# EAGLE board PWM-Power-Box_simplified_R1.0 (EAGLE 9.5.1)
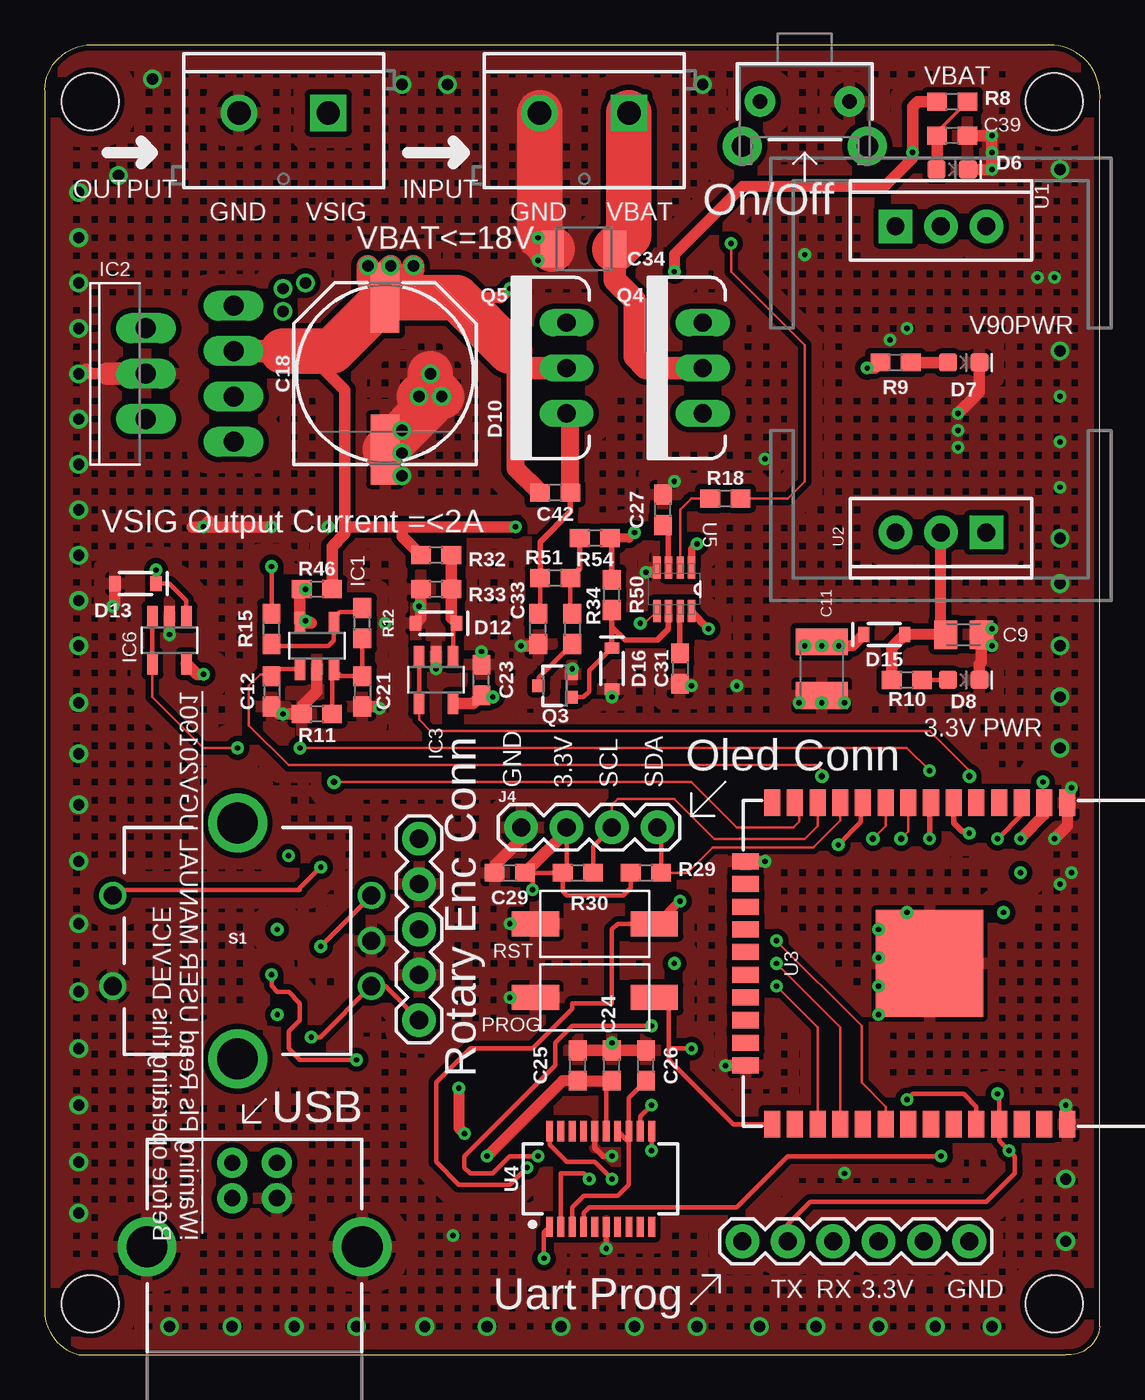
[diagram p0: board, top side]
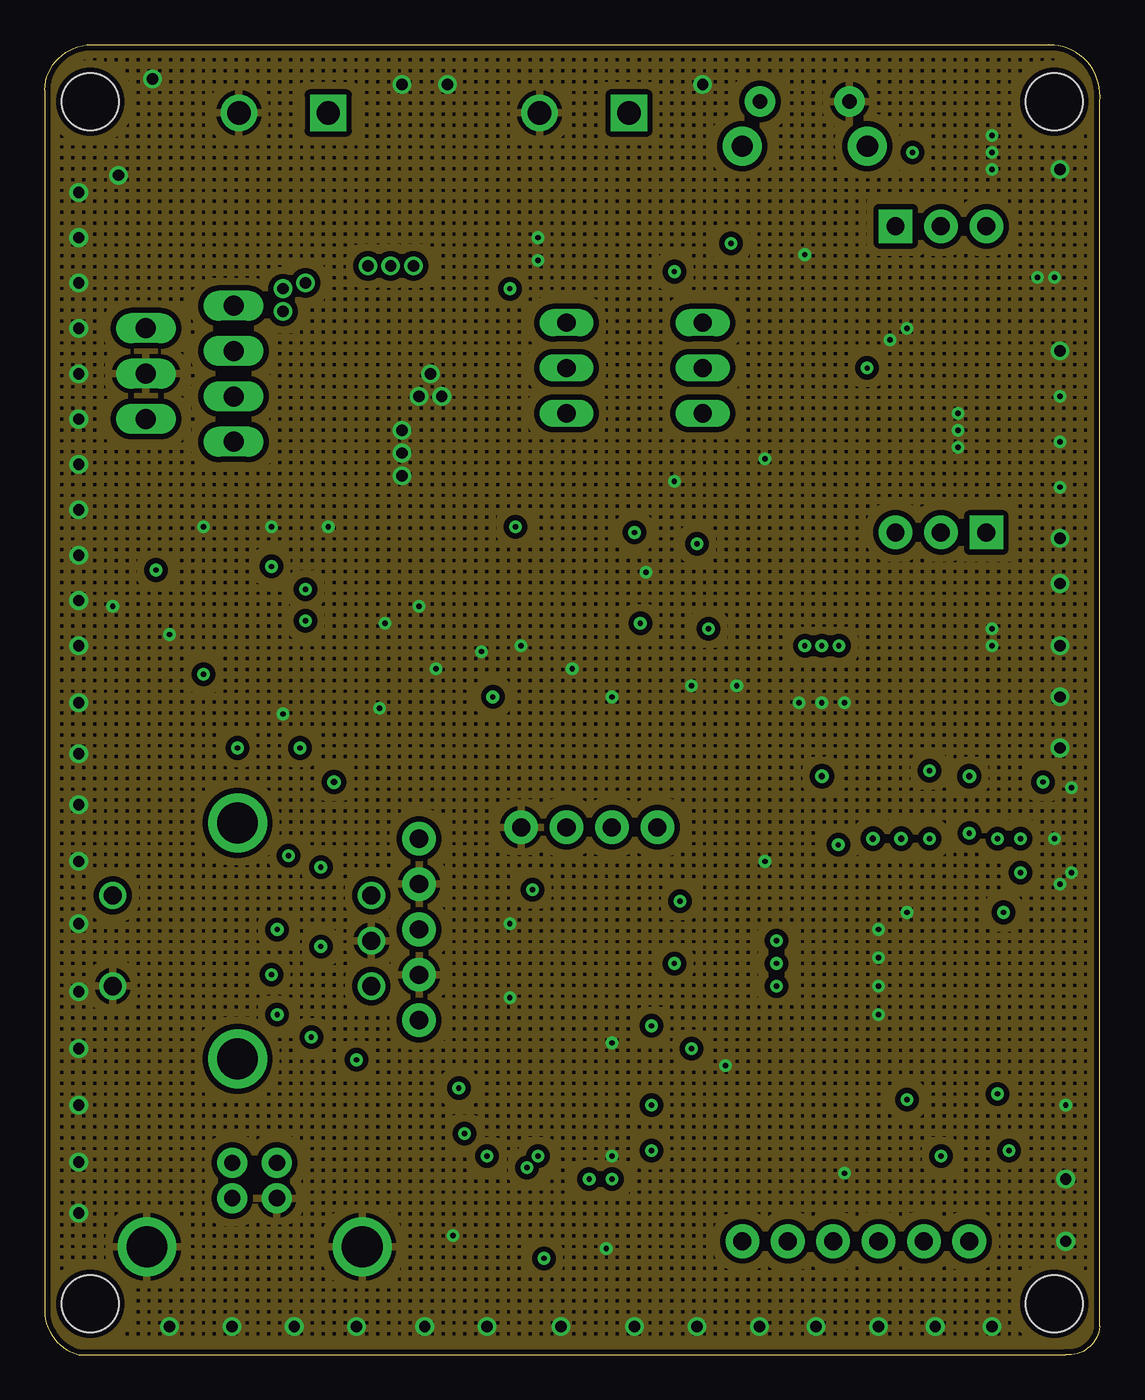
[diagram p1: board, inner layer Route2]
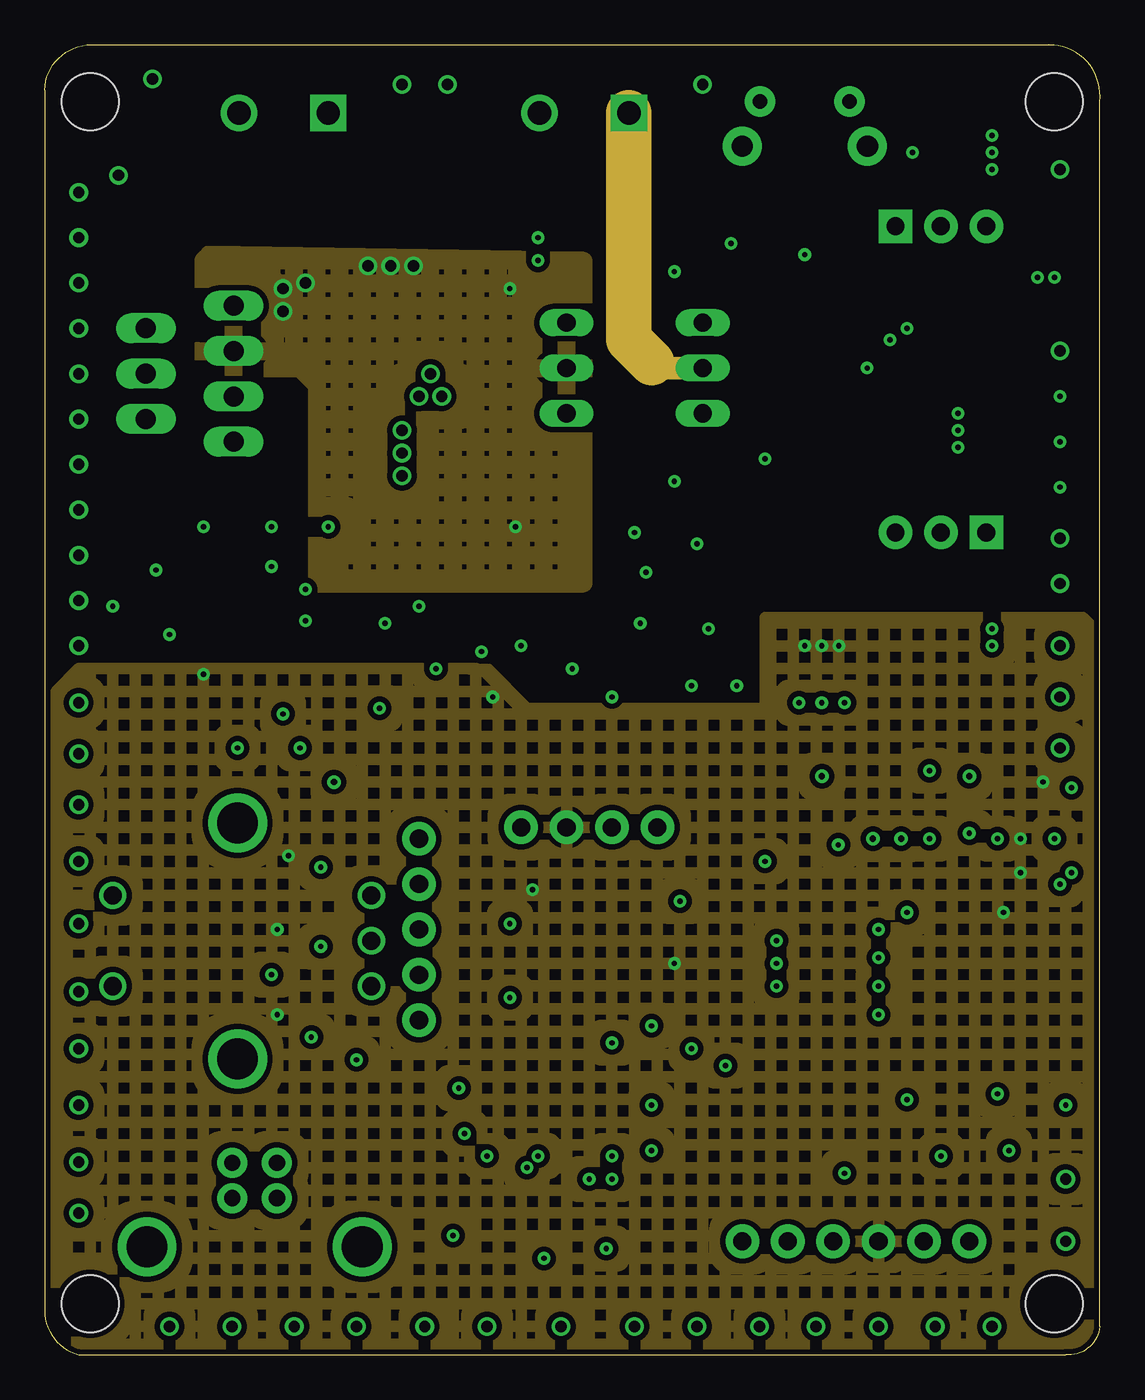
[diagram p2: board, inner layer Route15]
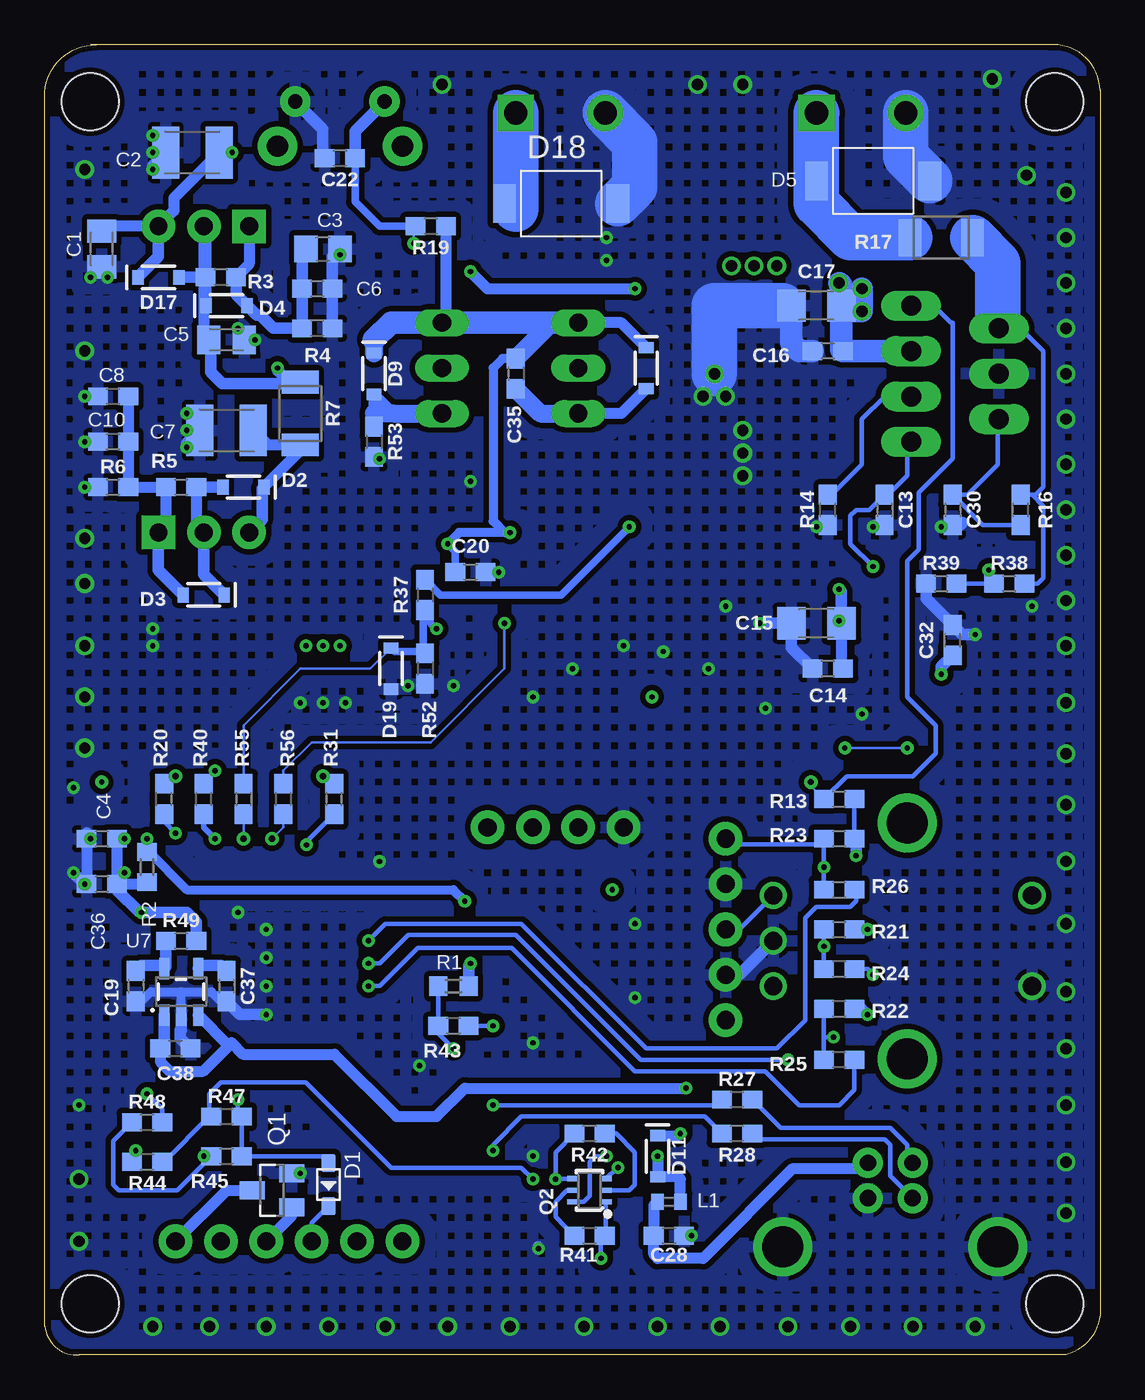
[diagram p3: board, bottom side, seen from below]

Size 59.07 x 73.36 mm. Coordinates in mm from the lower left corner, seen from the top.
Outline: 56.2,73.35 arc-97 59.05,70.17 59.05,1.59 arc-90 57.15,0.01 1.91,0.01 arc-69 0,2.23 0,70.81 arc-94 2.86,73.35 56.52,73.35
Copper layers (1+2*15+16): Top 0.035mm / dielectric 1.5mm / Route2 0.035mm / dielectric 0.15mm / Route15 0.035mm / dielectric 0.2mm / Bottom 0.035mm
Design rules "default *": minimum track width 6mil, minimum drill 0.3mm, track to track 6mil, track to pad 6mil, pad to pad 6mil, via to via 6mil, smd to smd 0mil, copper to edge 10mil, drill to drill 6mil, minimum pad ring 10mil, minimum via ring 8mil, stop-mask expansion 4mil, vias tented up to drill 0.4mm, thermal gap 10mil
Net classes: 1 gnd: width 0.635 mm, drill 0.635 mm, clearance 0.254 mm; 2 vcc: width 0.406 mm, drill 0.406 mm, clearance 0.254 mm
Holes 3.2 mm at 2.54,70.17 56.52,70.17 56.52,2.86 2.54,2.86

## Footprints (pad centres in the part's own frame; a part is rotated, then mirrored left to right if it is on the bottom)
C0805K = smd 1.3 x 1.6: 1 -1,0; 2 1,0
C1210K = smd 1.5 x 2.9: 1 -1.5,0; 2 1.5,0
C0805 = smd 1.3 x 1.5: 1 -0.95,0; 2 0.95,0
C0603 = smd 1.1 x 1: 1 -0.85,0; 2 0.85,0
0603 = smd 1.1 x 1: 1 -0.85,0; 2 0.85,0
1206 = smd 1.6 x 1.8: 1 -1.4,0; 2 1.4,0
PANASONIC_G = smd 3.9 x 1.6: + 4.25,0; - -4.25,0
1210 = smd 1.27 x 2.06: 1 -1.755,0; 2 1.755,0
SOD-323 = smd 1 x 0.8: + -1.2,0; - 1.2,0
SOD-323' = smd 0.63 x 0.83: A 1.15,0; C -1.15,0
SMBG = smd 1.27 x 2.16: A 3.17,0; C -3.17,0
LED-0603 = smd 1 x 1: A -0.877,0; C 0.877,0
SOT23-5 = smd 0.6 x 1.2: 1 -0.95,-1.306; 2 0,-1.306; 3 0.95,-1.306; 4 0.95,1.306; 5 -0.95,1.306
TO220-7 = drill 1.118 pad 1.626 long: 1 -3.81,-8.036; 2 -2.54,-3.126; 3 -1.27,-8.036; 4 0,-3.126; 5 1.27,-8.036; 6 2.54,-3.126; 7 3.81,-8.036
SCREWTERMINAL-5MM-2 = drill 1.3 pad 2.032 square: 1 0,0 | drill 1.3 pad 2.032: 2 5,0
1X05 = drill 1.016 pad 1.88: 1 0,0; 2 2.54,0; 3 5.08,0; 4 7.62,0; 5 10.16,0
USB-B-PTH = drill 0.914 pad 1.676: D+ 4,1.25; D- 5.981,1.25; GND 4,-1.25; VBUS 5.981,-1.25 | drill 2.286: SHLD1 1.282,-6.02; SHLD2 1.282,6.02
1X04 = drill 1.016 pad 1.88: 1 0,0; 2 2.54,0; 3 5.08,0; 4 7.62,0
1X06 = drill 1.016 pad 1.88: 1 0,0; 2 2.54,0; 3 5.08,0; 4 7.62,0; 5 10.16,0; 6 12.7,0
0402 = smd 0.7 x 0.9: 1 -0.65,0; 2 0.65,0
SOT23 = smd 1 x 1.4: 1 -0.95,-1.1; 2 0.95,-1.1; 3 0,1.1
SC70-6 = smd 0.3 x 0.66: 1 -0.65,-0.92; 2 0,-0.92; 3 0.65,-0.92; 4 0.65,0.92; 5 0,0.92; 6 -0.65,0.92
SOT323 = smd 0.7 x 0.7: 1 -0.65,-0.925; 2 0.65,-0.925; 3 0,0.925
TO220V = drill 1.016 long: 1 -2.54,0; 2 0,0; 3 2.54,0
R0603 = smd 1 x 1.1: 1 -0.85,0; 2 0.85,0
ROTARY_ENC_PLAIN = drill 1.016: A 7.493,-2.54; B 7.493,2.54; C 7.493,0; SW+ -6.985,2.54; SW- -6.985,-2.54 | drill 2.286: P$3 0,6.604; P$4 0,-6.604
TACTILE_SWITCH_PTH_RIGHT_ANGLE_KIT = drill 0.8 pad 1.7: 1 -2.5,0; 2 2.5,0 | drill 1.2 pad 2.2: ANCHOR1 -3.5,2.5; ANCHOR2 3.5,2.5
SW2-4.0-6.0X3.0X2.5MM = smd 2.65 x 1.4: 1 -3.325,0; 2 3.325,0
TO220-ADJ = drill 1 pad 1.88 square: ADJ -2.54,0 | drill 1 pad 1.88: IN 2.54,0; OUT 0,0
ESP-WROOM-32 = smd 0.9 x 1.5: 1 7.7,9; 2 6.43,9; 3 5.16,9; 4 3.89,9; 5 2.62,9; 6 1.35,9; 7 0.08,9; 8 -1.19,9; 9 -2.46,9; 10 -3.73,9; 11 -5,9; 12 -6.27,9; 13 -7.54,9; 14 -8.81,9; 25 -8.81,-9; 26 -7.54,-9; 27 -6.27,-9; 28 -5,-9; 29 -3.73,-9; 30 -2.46,-9; 31 -1.19,-9; 32 0.08,-9; 33 1.35,-9; 34 2.62,-9; 35 3.89,-9; 36 5.16,-9; 37 6.43,-9; 38 7.7,-9 | smd 1.5 x 0.9: 15 -10.3,5.715; 16 -10.3,4.445; 17 -10.3,3.175; 18 -10.3,1.905; 19 -10.3,0.635; 20 -10.3,-0.635; 21 -10.3,-1.905; 22 -10.3,-3.175; 23 -10.3,-4.445; 24 -10.3,-5.715 | smd 6 x 6: GND 0,0
SSOP20_L = smd 0.381 x 1.143: 1 -2.857,-2.68; 2 -2.223,-2.68; 3 -1.587,-2.68; 4 -0.953,-2.68; 5 -0.318,-2.68; 6 0.318,-2.68; 7 0.953,-2.68; 8 1.587,-2.68; 9 2.223,-2.68; 10 2.857,-2.68; 11 2.857,2.68; 12 2.223,2.68; 13 1.587,2.68; 14 0.953,2.68; 15 0.318,2.68; 16 -0.318,2.68; 17 -0.953,2.68; 18 -1.587,2.68; 19 -2.223,2.68; 20 -2.857,2.68
SOT65P280X100-8N = smd 1.219 x 0.406: 1 -1.219,0.965; 2 -1.219,0.33; 3 -1.219,-0.33; 4 -1.219,-0.965; 5 1.219,-0.965; 6 1.219,-0.33; 7 1.219,0.33; 8 1.219,0.965
SOT23-5' = smd 0.55 x 1.2: 1 -0.95,-1.3; 2 0,-1.3; 3 0.95,-1.3; 4 0.95,1.3; 5 -0.95,1.3

## Placement (x,y rotation side)
C1  0.1uF  [C0805K]  55.88,61.92 270 bottom
C2  10uF/25V/X5R  [C1210K]  50.8,67.32 180 bottom
C3  10uF/25V/X5R  [C0805]  43.5,61.92 0 bottom
C4  10u  [C0603]  55.88,28.9 180 bottom
C5  1uF/25V  [C0805K]  48.9,56.84 0 bottom
C6  0.1uF  [C0603]  43.82,59.7 0 bottom
C7  10uF/25V/X5R  [C1210K]  48.9,51.76 180 bottom
C8  10uF/25V/X5R  [C0603]  55.25,53.66 180 bottom
C9  1uF/25V  [C0805K]  51.44,40.33 0 top
C10  0.1uF  [C0603]  55.25,51.12 180 bottom
C11  10uF/25V/X5R  [C1210K]  43.5,38.42 270 top
C12  5.6PF  [0603]  12.7,37.15 270 top
C13  5.6PF  [0603]  12.06,47.31 270 bottom
C14  0.1uF/25V/X7R  [0603]  15.24,38.42 180 bottom
C15  10uF  [1206]  15.88,40.96 180 bottom
C16  0.1uF/25V/X7R  [0603]  15.24,56.2 180 bottom
C17  10uF  [1206]  15.88,58.74 180 bottom
C18  560uF  [PANASONIC_G]  19.05,54.93 90 top
C19  4.7uF  [0603]  53.98,20.64 270 bottom
C20  0.1uF  [0603]  35.24,43.82 0 bottom
C21  5.6PF  [0603]  17.78,37.15 270 top
C22  0.1uF  [0603]  42.55,67 180 bottom
C23  0.1uF  [0603]  24.45,37.79 90 top
C24  0.1uF  [0603]  31.75,16.2 90 top
C25  4.7uF  [0603]  29.84,16.2 90 top
C26  0.1uF  [0603]  33.66,16.2 90 top
C27  0.22uF  [0603]  34.61,47.31 90 top
C28  0.1uF  [0603]  24.13,6.67 0 bottom
C29  4.7uF  [0603]  26.04,26.99 0 top
C30  5.6PF  [0603]  8.26,47.31 270 bottom
C31  0.22uF  [0603]  35.56,38.42 270 top
C32  0.1uF  [0603]  8.26,40.01 90 bottom
C33  1uF  [0603]  27.62,40.65 90 top
C34  10uF  [1210]  30.16,61.92 180 top
C35  10nF  [0603]  32.7,54.93 270 bottom
C36  0.1uF  [C0603]  55.88,26.36 180 bottom
C37  470pF  [0603]  48.9,20.64 270 bottom
C38  4.7uF  [0603]  51.75,17.15 0 bottom
C39  10nF  [C0603]  50.8,68.27 180 top
C42  10nF  [0603]  28.57,48.27 180 top
D1  [SOD-323]  43.18,9.53 270 bottom
D2  250mA/100V  [SOD-323']  47.94,48.58 180 bottom
D3  250mA/100V  [SOD-323']  50.17,42.55 180 bottom
D4  250mA/100V  [SOD-323']  48.9,58.74 0 bottom
D5  24V  [SMBG]  12.7,65.73 0 bottom
D6  GREEN  [LED-0603]  50.8,66.36 0 top
D7  GREEN  [LED-0603]  51.44,55.57 0 top
D8  GREEN  [LED-0603]  51.44,37.79 0 top
D9  10V  [SOD-323']  40.64,54.93 270 bottom
D10  10V  [SOD-323']  25.4,55.25 270 bottom
D11  1A/23V/620mV  [SOD-323']  24.77,11.12 270 bottom
D12  3.3V  [SOD-323']  21.91,40.96 180 top
D13  3.3V  [SOD-323']  5.08,43.19 180 top
D15  1A/23V/620mV  [SOD-323']  46.99,40.33 0 top
D16  6v  [SOD-323']  31.75,38.42 270 top
D17  250mA/100V  [SOD-323']  52.71,60.33 0 bottom
D18  24v  [SMBG]  30.16,64.46 0 bottom
D19  3.3V  [SOD-323']  39.69,38.42 270 bottom
IC1  LM321MF  [SOT23-5]  15.24,39.69 0 top
IC2  OPA548T  [TO220-7]  2.54,54.93 90 top
IC3  LMV321M5X  [SOT23-5]  21.91,37.79 180 top
IC6  LMV321M5X  [SOT23-5]  6.98,40.01 180 top
J1  [SCREWTERMINAL-5MM-2]  32.7,69.54 180 top
J2  [1X05]  20.95,18.74 90 top
J3  USB_B_PTH  [USB-B-PTH]  11.75,4.77 90 top
J4  [1X04]  26.67,29.53 0 top
J5  [SCREWTERMINAL-5MM-2]  15.88,69.54 180 top
J7  [1X06]  39.05,6.36 0 top
L1  Ferrite Bead  [0402]  24.13,8.58 0 bottom
Q1  2N7002  [SOT23]  46.36,9.21 90 bottom
Q2  MBT3904DW1T1  [SC70-6]  28.57,9.21 90 bottom
Q3  310mA/60V/1.6Ω  [SOT323]  28.57,37.47 90 top
Q4  FQP27P06 -60V -27A P-CH  [TO220V]  36.83,55.25 90 top
Q5  FQP27P06 -60V -27A P-CH  [TO220V]  29.21,55.25 90 top
R1  10k  [R0603]  36.2,20.64 0 bottom
R2  10k  [R0603]  53.34,27.31 270 bottom
R3  240  [0603]  49.21,60.33 180 bottom
R4  1.5k  [0603]  43.82,57.47 180 bottom
R5  240  [0603]  51.44,48.58 0 bottom
R6  390  [0603]  55.25,48.58 0 bottom
R7  0  [1210]  44.77,52.71 270 bottom
R8  5.6k  [0603]  50.8,70.17 0 top
R9  3.7k  [0603]  47.62,55.57 0 top
R10  750  [0603]  48.26,37.79 0 top
R11  2.4k  [0603]  15.24,35.88 180 top
R12  10k  [0603]  17.78,40.96 90 top
R13  10k  [0603]  14.61,31.12 0 bottom
R14  10k  [0603]  15.24,47.31 90 bottom
R15  0  [0603]  12.7,40.65 90 top
R16  0  [0603]  4.45,47.31 90 bottom
R17  0  [1210]  8.89,62.55 180 bottom
R18  1k  [0603]  38.1,47.95 0 top
R19  10k  [0603]  37.47,63.19 180 bottom
R20  0  [0603]  52.39,31.12 90 bottom
R21  10k  [0603]  14.61,23.82 0 bottom
R22  10k  [0603]  14.61,19.37 0 bottom
R23  10k  [0603]  14.61,28.9 0 bottom
R24  1k  [0603]  14.61,21.6 180 bottom
R25  1k  [0603]  14.61,16.52 180 bottom
R26  1k  [0603]  14.61,26.04 0 bottom
R27  27  [0603]  20.32,14.29 0 bottom
R28  27  [0603]  20.32,12.39 180 bottom
R29  4.7k  [0603]  33.66,26.99 0 top
R30  4.7k  [0603]  29.84,26.99 0 top
R31  0  [0603]  42.86,31.12 90 bottom
R32  9.1k  [0603]  21.91,44.77 180 top
R33  1k  [0603]  21.91,42.87 0 top
R34  15k  [0603]  29.53,40.65 270 top
R37  14K  [0603]  37.78,42.55 270 bottom
R38  9.1k  [0603]  5.08,43.19 0 bottom
R39  1k  [0603]  8.89,43.19 0 bottom
R40  0  [0603]  50.17,31.12 90 bottom
R41  10k  [0603]  28.57,6.67 0 bottom
R42  10k  [0603]  28.57,12.39 180 bottom
R43  0  [0603]  36.2,18.42 0 bottom
R44  10k(NOSTUFF)  [0603]  53.34,10.8 180 bottom
R45  10k  [0603]  48.9,11.12 0 bottom
R46  0  [0603]  15.24,42.87 0 top
R47  10k  [0603]  48.9,13.34 0 bottom
R48  10k(NOSTUFF)  [0603]  53.34,13.02 0 bottom
R49  0  [0603]  51.44,23.18 0 bottom
R50  10k  [0603]  31.75,42.55 90 top
R51  100k  [0603]  28.57,43.5 0 top
R52  1k  [0603]  37.78,38.42 270 bottom
R53  10k  [0603]  40.64,51.12 270 bottom
R54  10k  [0603]  30.8,45.73 180 top
R55  0  [0603]  47.94,31.12 270 bottom
R56  0  [0603]  45.72,31.12 270 bottom
S1  ENCODER-SWITCH  [ROTARY_ENC_PLAIN]  10.79,23.18 0 top
S2  MOMENTARY-SWITCH-SPST-PTH-RIGHT-ANGLE-KIT  [TACTILE_SWITCH_PTH_RIGHT_ANGLE_KIT]  42.55,70.17 180 top
SW1  PROG  [SW2-4.0-6.0X3.0X2.5MM]  30.8,20.01 0 top
SW2  RST  [SW2-4.0-6.0X3.0X2.5MM]  30.8,24.14 0 top
U1  V_REG_317SINK  [TO220-ADJ]  50.17,63.19 0 top
U2  V_REG_317SINK  [TO220-ADJ]  50.17,46.04 180 top
U3  ESP-WROOM-32  [ESP-WROOM-32]  49.53,21.91 0 top
U4  FT231XS  [SSOP20_L]  31.11,9.85 0 top
U5  LTC2950CTS8-1TRPBF  [SOT65P280X100-8N]  35.24,42.87 270 top
U7  MIC5219 3.3V  [SOT23-5']  51.44,20.33 0 bottom

## Library data of the parts
C1-C3 C5-C11 C39 = rcl; SPICEPREFIX: C
C4 C36 R1 R2 = rcl
C12-C14 C16 C19 C21 C23-C26 C28-C30 C32 C37 C38 = SparkFun-Capacitors; PROD_ID: CAP-12456
C15 C17 = SparkFun-Capacitors; PROD_ID: CAP-10057
C18 = SparkFun-Capacitors; PROD_ID: CAP-09983
C20 C22 C27 C31 C33 C35 C42 = SparkFun-Capacitors; PROD_ID: CAP-11015
C34 = SparkFun-Capacitors; PROD_ID: CAP-09824
D1 = Seeed-OPL-Diode
D2-D4 D17 = SparkFun-DiscreteSemi; PROD_ID: DIO-09646
D5 D18 = diode
D6-D8 = SparkFun-LED; PROD_ID: DIO-00821
D9 D10 D16 D19 = SparkFun-DiscreteSemi; PROD_ID: DIO-08199
D11 D15 = SparkFun-DiscreteSemi; PROD_ID: DIO-11623
D12 D13 = SparkFun-DiscreteSemi; PROD_ID: DIO-11284
IC1 IC3 IC6 = linear
IC2 = burr-brown; MF: TEXAS INSTRUMENTS; MPN: OPA548T; OC_FARNELL: 1564885; OC_NEWARK: 69K2680
J1 J5 = SparkFun-Connectors; SF_SKU: PRT-08432
J2 = SparkFun-Connectors
J3 = SparkFun-Connectors; PROD_ID: CONN-08278; SF_ID: PRT-00139
J4 = SparkFun-Connectors; PROD_ID: CONN-09696
J7 = SparkFun-Connectors; PROD_ID: CONN-08437
L1 = inductors
Q1 = nxp_60_1_1
Q2 = SparkFun-DiscreteSemi; PROD_ID: TRANS-13337
Q3 = SparkFun-DiscreteSemi; PROD_ID: TRANS-11151
Q4 Q5 = SparkFun-DiscreteSemi; PROD_ID: TRANS-13060
R3-R6 R8-R16 R20-R33 R38-R49 = SparkFun-Resistors; PROD_ID: RES-08306
R7 R17 = SparkFun-Resistors; PROD_ID: RES-12374
R18 R19 R34 R37 R50-R54 = SparkFun-Resistors; PROD_ID: RES-07828
R55 R56 = SparkFun-Resistors; PROD_ID: RES-07856
S1 = SparkFun-Switches; SF_SKU: COM-09117
S2 = SparkFun-Switches; PROD_ID: CONN-10672; SF_SKU: COM-10791
SW1 SW2 = Seeed-OPL-Switch
U1 U2 = SparkFun-IC-Power
U3 = esp32
U4 = SparkFun-IC-Comms; PROD_ID: IC-11524
U5 = LTC2950CTS8-1TRPBF; AVAILABILITY: Unavailable; DESCRIPTION: PUSHBUTTON, CNTRL, 26.4VIN, 8TSOT23; SVHC: No SVHC _20-Jun-2013_; MF: Linear Technology/Analog; MP: LTC2950CTS8-1#TRPBF; PACKAGE: TSOT-23 Linear Technology; PRICE: None
U7 = SparkFun-IC-Power; PROD_ID: VREG-09872

## Nets
!INT: R56.1 U5.5
!KILL: D19.C R37.2 R52.1 R55.1 U5.8
!PB: R18.1 U5.2
!PB1: C22.1 R18.2 R19.2 S2.2
AMP_DAC1_OUT: R31.1 U3.10
BAT_ADC_IN: R20.1 U3.6
BAT_OP_IN: D12.C IC3.1 R32.1 R33.2
BAT_OP_OUT: IC3.3 IC3.4 R20.2
CLK: U3.20
CMD: U3.19
DAC_OP_OUT: IC6.3 IC6.4 R40.2
DAC_OUT_OP_IN: D13.C IC6.1 R38.1 R39.2
DTR: Q2.1 R41.2 U4.1
EN: Q2.3 R2.1 SW2.2 U3.3
FT232_RXD: R45.1 R48.1 U4.4
FT232_TXD: R44.1 R47.1 U4.20
GND [gnd]: C1.2 C2.2 C3.2 C4.2 C5.2 C6.2 C7.2 C8.2 C9.2 C10.2 C11.2 C12.2 C13.2 C14.2 C15.2 C16.2 C17.2 C18.- C19.2 C20.2 C21.2 C22.2 C23.2 C24.2 C25.2 C26.2 C27.2 C28.2 C29.1 C30.2 C31.2 C32.2 C33.1 C34.2 C36.2 C37.2 C38.2 C39.1 D5.A D6.C D7.C D8.C D12.A D13.A D16.A D18.A D19.A IC1.2 IC2.4 IC3.2 IC6.2 J1.2 J2.2 J2.4 J3.GND J3.SHLD1 J3.SHLD2 J4.1 J5.2 Q1.2 Q3.2 R4.1 R6.1 R11.2 R14.1 R33.1 R39.1 R52.2 R53.2 S1.C S1.SW- S2.1 SW1.1 SW2.1 U3.1 U3.15 U3.24 U3.38 U3.GND U4.6 U4.16 U5.4 U7.2
GND_IN [gnd]: J7.6 Q1.3
IO0: R1.1 R43.1 SW1.2 U3.25
IO4: U3.26
IO5: U3.29
IO8: U3.22
IO12: U3.14
IO13: U3.16
IO15: U3.23
IO19: U3.31
IO21: U3.33
IO23: U3.37
IO32: R55.2 U3.8
IO33: R56.2 U3.9
IO36: U3.4
IO39: U3.5
LM321_IN+: C12.1 IC1.1 R31.2
LM321_IN-: C21.1 IC1.3 R11.1 R12.1
LM321_OUT: IC1.4 R12.2 R15.1
LTC2950_EN: D16.C Q3.1 R50.1 U5.6
MIC5219_IN: C38.1 D11.C U7.1 U7.3
MIC5219_V33: C19.1 R49.1 U7.5
N$1: C3.1 C6.1 D4.A R3.1 R4.2 U1.ADJ
N$2: C8.1 C10.1 D3.A R5.1 R6.2 U2.ADJ
N$3: C7.1 D2.C R7.2 U2.IN
N$4: C39.2 D6.A R8.2
N$5: D7.A R9.2
N$6: D8.A R10.2
N$7: C37.1 U7.4
N$8: C33.2 C35.2 C42.1 D10.A Q5.1 R51.1
N$9: D9.A Q4.1 R53.1
N$11: Q3.3 R34.2
N$12: IC2.3 R14.2
N$18: J2.5 R23.1 R26.1 S1.SW+
N$19: J2.3 R21.1 R24.2 S1.B
N$20: J2.1 R22.1 R25.2 S1.A
N$21: C26.1 U4.3 U4.13 U4.14
N$23: R27.1 U4.12
N$24: R28.2 U4.11
N$25: J3.D+ R28.1
N$26: J3.D- R27.2
N$27: Q2.5 R41.1
N$33: Q2.2 R42.1
N$36: Q2.6 R43.2
OFFT: C31.1 U5.7
ONT: C27.1 U5.3
OPA548_IN+: C13.1 IC2.1 R15.2
OPA548_IN-: C30.1 IC2.2 R16.1
OPA548_OUT: IC2.6 R16.2 R17.1 R38.2
OPA548_STAT: IC2.7 R13.1 U3.13
OUT_ADC_IN: R40.1 U3.7
Q3D: R34.1 R51.2 R54.2
ROTA: R25.1 U3.27
ROTB: R24.1 U3.28
ROTP: R26.2 U3.30
RTS: Q2.4 R42.2 U4.2
RTS0: U3.36
RX: D1.- J7.3
RXD0: D1.+ R45.2 R47.2 U3.34
SCL: J4.3 R30.2 U3.12
SD2: U3.17
SD3: U3.18
SDA: J4.4 R29.2 U3.11
SDO: U3.21
TXD0: J7.2 R44.2 R48.2 U3.35
V33: C4.1 C11.1 C23.1 C29.2 C32.1 C36.1 D15.C IC3.5 IC6.5 J4.2 J7.4 Q1.1 R1.2 R2.2 R13.2 R21.2 R22.2 R23.2 R29.1 R30.1 R49.2 U3.2
V36: C9.1 D2.A D3.C D15.A R5.2 R10.1 U2.OUT
V90: C5.1 D4.C D17.A R3.2 R7.1 R9.1 U1.OUT
V135: C1.1 C2.1 C16.1 C17.1 C18.+ C42.2 D17.C IC2.5 Q5.2 R8.1 R32.2 R37.1 R46.2 U1.IN
VBAT+: C34.1 D18.C J1.1 Q4.2
VCC_OPAMP: C14.1 C15.1 IC1.5 R46.1
VIN_LTC2950: C20.1 C35.1 D9.C D10.C Q4.3 Q5.3 R19.1 R50.2 R54.1 U5.1
VSIG: D5.C J5.1 R17.2
VUSB_5V: C24.1 C25.1 D11.A L1.2 U4.15
VUSB_5V_PRE: C28.1 J3.VBUS L1.1

## Tracks (layer width: path | path; a pad name or v marks a point on that pad's centre or on a via)
!INT  (via drill 0.3)
  Top 0.152: U5.5 33.59,40.96 v33.34,40.96
  Bottom 0.152: v33.34,40.96 33.34,38.42 37.47,34.3 44.13,34.3 45.72,32.71 R56.1
!KILL  (via drill 0.3)
  Top 0.406: v37.15,40.65 36.21,41.59 U5.8
  Bottom 0.152: R55.1 47.94,35.25 44.77,38.42 40.84,38.42 D19.C
  Bottom 0.305: 37.89,39.38 R52.1
  Bottom 0.406: v37.15,40.65 37.78,41.28 R37.2 37.89,41.6 37.89,39.38 39.49,39.38 D19.C
!PB
  Top 0.152: U5.2 35.57,47.33 36.2,47.95 R18.1
!PB1  (via drill 0.3)
  Top 0.152: R18.2 41.59,47.95 42.55,48.9 42.55,56.52 38.42,60.65 v38.42,62.24
  Bottom 0.152: v38.42,62.24 38.42,63.09 | 38.53,62.98 38.42,63.09 | 38.42,63.09 R19.2
  Bottom 0.406: R19.2 40.32,63.19 41.7,64.56 C22.1
  Bottom 0.635: C22.1 41.7,68.52 S2.2
AMP_DAC1_OUT  (via drill 0.3)
  Top 0.254: U3.10 45.69,30.81 45.69,29.82 v44.42,28.55
  Bottom 0.254: v44.42,28.55 44.42,28.71 R31.1
BAT_ADC_IN  (via drill 0.3)
  Top 0.152: 51.67,29.3 v51.75,29.22
  Top 0.305: U3.6 50.88,29.77 51.36,29.3 51.67,29.3
  Bottom 0.254: R20.1 52.39,29.85 v51.75,29.22
BAT_OP_IN
  Top 0.254: IC3.1 22.86,40.76 D12.C
  Top 0.635: R32.1 R33.2 22.76,41.26 D12.C
BAT_OP_OUT  (via drill 0.35)
  Top 0.152: v51.75,32.39 51.75,32.71 49.53,34.93 21.59,34.93 20.95,35.57 20.95,36.83 20.96,36.84
  Top 0.254: IC3.3 20.96,36.84 IC3.4
  Bottom 0.152: v51.75,32.39 52.17,31.97 R20.2
DAC_OP_OUT  (via drill 0.3)
  Top 0.152: IC6.4 6.04,36.83 8.89,33.98 v10.79,33.98 | v49.53,32.71 48.26,33.98 v14.29,33.98
  Top 0.254: IC6.4 IC6.3
  Bottom 0.152: v49.53,32.71 49.53,32.61 R40.2 | v14.29,33.98 v10.79,33.98
DAC_OUT_OP_IN  (via drill 0.3)
  Top 0.254: v6.23,43.94 D13.C 6.98,43.19 7.94,42.24 IC6.1
  Bottom 0.254: v6.23,43.94 6.23,43.49 R38.1 R39.2
DTR  (via drill 0.3)
  Top 0.254: v27.94,5.4 27.94,6.85 U4.1
  Bottom 0.254: Q2.1 27.66,6.74 R41.2 27.94,6.46 v27.94,5.4
EN  (via drill 0.3)
  Top 0.254: U3.3 54.69,30.25 v53.34,28.9 | v26.99,10.48 26.04,9.53 23.18,9.53 21.91,10.8 21.91,15.25 23.81,17.15 27.3,17.15 29.53,19.37 29.53,19.69 31.75,19.69 31.75,23.82 32.07,24.14 34.29,24.14
  Top 0.508: v35.56,25.41 34.29,24.14 SW2.2
  Bottom 0.254: v53.34,28.9 R2.1 | Q2.3 27.04,10.48 v26.99,10.48
  Bottom 0.508: R2.1 53.29,28.21 51.12,26.04 36.2,26.04 v35.56,25.41
FT232_RXD  (via drill 0.3)
  Top 0.254: U4.4 30.16,7.94 30.48,8.26 38.74,8.26 41.59,11.12 v50.17,11.12
  Bottom 0.254: v50.17,11.12 R45.1 51.65,9.21 54.93,9.21 55.25,9.53 55.25,11.97 R48.1
FT232_TXD  (via drill 0.3)
  Top 0.254: U4.20 28.26,11.75 29.21,10.8 30.8,10.8 v31.75,9.85
  Bottom 0.254: R44.1 52.39,10.8 49.85,13.34 | 49.85,13.34 R47.1 | v31.75,9.85 32.38,10.48 39.69,10.48 44.45,15.25 49.21,15.25 49.85,14.61 49.85,13.34
GND  (via drill 0.3, 0.64)
  Top 0.254: U5.4 34.01,43.82
  Top 0.305: U4.6 v31.43,5.95 | v31.75,11.12 31.25,11.12 30.8,11.58 U4.16
  Top 0.61: U3.1 57.23,29.61
  Top 0.635: D13.A 3.93,42.04 v3.81,41.92 | R33.1 21.06,41.26 D12.A | C9.2 52.44,38.79 52.31,38.67 D8.C | J4.1 26.67,28.9 25.18,27.41 C29.1 | IC1.2 15.24,37.15 14.39,36.3 R11.2 v13.33,35.88 13.12,35.88 C12.2 | v56.52,28.9 57.23,29.61 | SW1.1 v26.04,20.01 | C25.2 C24.2 C26.2 | C21.2 18.63,36.3 v18.73,36.2 | C23.2 v24.45,39.38 | IC6.2 v6.98,40.33 | U3.38 57.15,12.99 v57.15,13.98 | U3.GND 48.58,21.91 v46.67,23.82 | U3.GND 46.99,21.91 v46.67,22.23 | U3.GND 47.94,21.91 v46.67,20.64 | U3.GND 48.26,23.18 v48.26,24.77 | U3.15 v40.32,27.63 | U3.24 v38.1,16.2 | 2.29,55.19 2.54,54.93 3.49,54.93 | D7.C 52.31,53.91 v51.12,52.71 | v42.23,36.52 v43.5,36.52 C11.2 44.36,36.92 v44.77,36.52 | C9.2 53.02,39.74 v53.02,39.69 | C9.2 52.75,40.65 v53.02,40.65 | SW2.1 v26.04,24.14 | v8.89,46.36 8.26,46.36 | 9.53,46.36 9.21,46.68 v8.89,46.36 | v8.89,46.36 9.53,46.36 | v12.7,46.36 9.53,46.36 | 34.01,43.82 v33.66,43.82 | C39.1 v53.02,68.27 v53.02,66.36 D6.C | C33.1 27.52,39.69 v26.67,39.69 | v29.53,38.42 29.5,38.4 Q3.2 29.54,38.12
  Top 1.27: 3.49,54.93 IC2.4
  Top 2.54: C18.- 21.59,53.22 v21.59,54.93 21.59,54.3 v22.22,53.66 v20.95,53.66 | J1.2 27.7,62.62 C34.2
  Bottom 0.508: U7.2 51.44,20.33 | 51.44,20.33 49.75,20.33 49.21,19.79 C37.2 | C19.2 53.66,19.79 53.12,20.33 51.44,20.33
  Bottom 0.61: v56.52,28.9 C4.2 | 56.73,29.22 C36.2
  Bottom 0.635: U7.2 51.44,18.16 51.48,18.21 51.48,17.73 C38.2 | S1.C 20.19,21.28 J2.2 | C4.2 56.73,29.22 | v31.43,5.95 31.43,6.04 | C14.2 17.27,39.61 C15.2 v19.05,40.96 | v6.98,40.33 7.72,40.33 C32.2 9.74,42.35 R39.1 | C36.2 v56.83,26.36 v57.47,26.99 | C37.2 48.16,19.06 v46.67,19.06 | C8.2 v56.83,53.66 | C10.2 v56.83,51.12 | R6.1 v56.83,48.58 | v51.12,51.76 C7.2 51.12,51.04 v51.12,50.81 | v48.26,57.47 47.9,57.11 C5.2 v47.31,56.84 | v42.55,61.6 C3.2 42.97,61.5 C6.2 R4.1 | v53.02,67.32 C2.2 53.02,66.59 v53.02,66.36 | C30.2 7.84,46.46 7.69,46.61 8.11,46.61 C30.2 | Q1.2 v44.77,10.16 v44.77,10.17 | C13.2 12.6,46.46 v12.7,46.36 | v8.89,46.36 8.36,46.36 C30.2 | v33.66,43.82 C20.2 | S2.1 43.5,68.63 43.5,67.1 C22.2
  Bottom 1.27: C17.2 17.27,56.65 16.83,56.2 C16.2
  Bottom 2.54: J1.2 26.04,67.87 26.04,65.42 D18.A | 17.78,58.74 21.59,58.74 v21.59,54.93 | D5.A 10.88,67.07 J5.2
  other vias: 1.91,54.93 1.91,57.47 1.91,60.01 1.91,62.55 1.91,65.09 4.13,66.05 31.75,17.47 20.95,41.92 21.91,38.42 55.56,60.33 56.52,60.33 15.88,46.36 22.86,6.67 57.47,31.76 20,51.76 20,50.49 20,49.22 31.75,36.84 36.2,37.47 38.74,37.47 35.24,48.9 40.32,50.17 27.62,62.55 27.62,61.28 1.91,52.39 1.91,49.85 1.91,47.31 1.91,44.77 1.91,42.23 1.91,39.69 1.91,36.52 1.91,33.66 1.91,30.8 1.91,27.63 1.91,24.14 1.91,20.33 1.91,17.15 1.91,13.98 1.91,10.8 1.91,7.94 6.98,1.59 10.48,1.59 13.97,1.59 17.46,1.59 21.27,1.59 24.77,1.59 28.89,1.59 33.02,1.59 36.51,1.59 40.01,1.59 43.18,1.59 46.67,1.59 49.85,1.59 53.02,1.59 57.15,6.36 57.15,9.85 56.83,33.98 56.83,36.84 56.83,39.69 56.83,43.19 56.83,45.73 56.83,56.2 56.83,66.36 6.03,71.44 20,71.13 22.54,71.13 36.83,71.13
  pour Route2 (isolate 0.305, hatched): 0,73.03 59.05,73.03 59.05,0.01 0,0.01
  pour Top (isolate 0.305, hatched): 0,73.03 59.37,73.03 59.37,0.01 59.05,-0.31 0,-0.31 0,72.71
  pour Bottom (isolate 0.305, hatched): 0,73.03 59.05,73.03 59.05,0.01 0,0.01
GND_IN
  Bottom 0.61: J7.6 48.9,9.21 Q1.3
IO0  (via drill 0.3)
  Top 0.254: U3.25 38.53,12.91 34.93,16.52 34.93,17.15 | 34.93,19.69 34.93,17.15 | v36.2,17.15 34.93,17.15
  Top 0.508: SW1.2 34.61,20.01 34.93,19.69
  Bottom 0.254: R1.1 R43.1 37.05,18 v36.2,17.15
IO32  (via drill 0.35)
  Top 0.152: v47.94,28.9 48.34,29.3 U3.8
  Bottom 0.152: R55.2 v47.94,28.9
IO33  (via drill 0.35)
  Top 0.152: U3.9 47.07,29.61 v46.36,28.9
  Bottom 0.152: v46.36,28.9 45.72,29.53 R56.2
LM321_IN+  (via drill 0.35)
  Top 0.152: v43.5,32.39 43.5,32.71 43.18,33.03 13.65,33.03 11.43,35.25 11.43,37.47 12.06,38.11 12.6,38.11 C12.1
  Top 0.254: IC1.1 13.08,38.39 C12.1
  Bottom 0.152: v43.5,32.39 43.08,31.97 R31.2
LM321_IN-
  Top 0.254: R11.1 16.09,38.29 IC1.3 16.57,38 C21.1 R12.1
LM321_OUT
  Top 0.254: R15.1 13.22,39.69 15.88,39.69 16.19,40.01 IC1.4 16.19,41.28 16.51,41.6 17.57,41.6 R12.2
LTC2950_EN
  Top 0.254: D16.C 30.48,38.3 30.48,37.15 30.15,36.82 Q3.1
  Top 0.305: U5.6 34.91,40.63 34.29,40.01 32.49,40.01 31.75,40.75 R50.1 31.8,41.65 31.75,41.6 D16.C 31.64,39.68
MIC5219_IN  (via drill 0.3)
  Top 0.61: v23.18,14.93 23.18,12.71 v23.5,12.39
  Bottom 0.61: D11.C 23.61,12.27 v23.5,12.39 | U7.3 48.77,17.31 | v23.18,14.93 35.56,14.93 37.15,13.34 39.37,13.34 42.86,16.83 47.98,16.83 48.61,17.47 48.77,17.31 | C38.1 52.6,16.41 52.07,15.88 50.2,15.88 48.77,17.31
  Bottom 0.635: U7.1 52.39,17.37 C38.1
MIC5219_V33
  Bottom 0.635: R49.1 52.29,21.73 U7.5 52.57,21.81 53.66,21.81 C19.1
N$1
  Bottom 0.61: R3.1 47.62,61.07 U1.ADJ
  Bottom 0.635: R3.1 48.36,59.36 D4.A 47.21,58.21 47.01,58.21 46.27,57.47 R4.2 C6.1 44.67,61.7 C3.1
N$2
  Bottom 0.61: U2.ADJ 52.29,46.46 R5.1 R6.2 C10.1 C8.1
  Bottom 0.635: U2.ADJ 52.71,43.94 D3.A
N$3
  Bottom 0.61: C7.1 46.59,50.96 R7.2 44.77,50.64 46.91,48.5
  Bottom 0.635: U2.IN 46.91,46.76 46.91,48.47 | 46.91,48.47 46.91,48.5 | D2.C 46.91,48.47
N$4
  Top 0.203: R8.2 49.95,68.47 C39.2
  Top 0.635: C39.2 49.95,66.39 D6.A
N$5
  Top 0.635: D7.A R9.2
N$6
  Top 0.254: D8.A R10.2
N$7
  Bottom 0.635: U7.4 50.3,21.81 49.21,21.81 C37.1
N$8
  Top 0.254: R51.1 27.72,41.6 C33.2
  Top 0.305: C42.1 29.43,47.21 27.72,45.51 R51.1
  Top 1.016: C42.1 29.43,52.5 Q5.1
  Bottom 0.61: D10.A 26.79,52.71 Q5.1
  Bottom 1.016: C35.2 31.33,52.71 Q5.1
N$9
  Bottom 0.61: 39.57,52.71 D9.A 40.64,52.71 R53.1
  Bottom 1.016: Q4.1 39.57,52.71 40.64,52.71
N$11
  Top 0.254: R34.2 27.65,37.92 Q3.3
N$12
  Bottom 0.254: IC2.3 12.06,53.66 13.33,52.39 13.33,49.85 15.03,48.16 R14.2
N$18  (via drill 0.3)
  Top 0.254: S1.SW+ 4.13,26.04 14.29,26.04 14.29,26.14 v15.46,27.31
  Bottom 0.254: J2.5 20.64,28.58 15.77,28.58 R23.1 v15.46,27.31 R26.1
N$19  (via drill 0.3)
  Top 0.254: v15.46,22.87 18.29,25.7 S1.B
  Bottom 0.254: J2.3 20.19,23.82 S1.B | R21.1 v15.46,22.87 R24.2
N$20  (via drill 0.3)
  Top 0.254: J2.1 19.05,20.64 S1.A 15.43,17.79 v14.92,17.79
  Bottom 0.254: R22.1 15.46,17.79 | 15.46,17.79 R25.2 | v14.92,17.79 15.46,17.79
N$21
  Top 0.254: U4.3 29.53,8.26 30.16,8.9 32.07,8.9 32.7,9.53 32.7,11.89 | 32.7,11.89 U4.13 32.7,14.4 C26.1 | U4.14 32.7,11.89
N$23  (via drill 0.3)
  Top 0.254: U4.12 33.34,13.34 v33.97,13.98
  Bottom 0.254: v33.97,13.98 21.49,13.98 R27.1
N$24  (via drill 0.3)
  Top 0.254: U4.11 v33.97,11.44
  Bottom 0.254: v33.97,11.44 33.97,11.75 32.38,13.34 22.12,13.34 R28.2
N$25
  Bottom 0.254: R28.1 19.15,12.07 12.06,12.07 11.75,11.75 11.75,10.02 J3.D+
N$26
  Bottom 0.254: R27.2 17.88,12.71 11.75,12.71 10.79,11.75 10.79,11.05 J3.D-
N$27
  Bottom 0.254: R41.1 29.95,7.2 30.48,7.73 30.48,7.94 30.48,8.58 29.84,9.21 Q2.5
N$33
  Bottom 0.254: Q2.2 26.35,9.21 26.04,9.53 26.04,11.33 27.09,12.39 R42.1
N$36  (via drill 0.3)
  Top 0.254: v27.62,11.12 26.04,11.12 25.08,10.17 23.81,10.17 23.5,10.48 23.5,11.12 28.57,16.2 28.57,17.47 29.53,18.42 v33.97,18.42
  Bottom 0.254: Q2.6 28.91,8.56 28.57,8.9 28.57,10.8 28.26,11.12 v27.62,11.12 | v33.97,18.42 R43.2
OFFT
  Top 0.305: C31.1 35.56,41.64 U5.7
ONT
  Top 0.305: U5.3 34.91,46.16 C27.1
OPA548_IN+  (via drill 0.3)
  Top 0.254: v12.7,44.14 R15.2
  Bottom 0.254: IC2.1 10.79,50.91 10.79,49.22 11.85,48.16 C13.1 12.91,47.31 13.65,47.31 13.97,47 13.97,45.41 v12.7,44.14
OPA548_IN-
  Bottom 0.254: IC2.2 5.71,52.35 5.71,49.85 7.4,48.16 C30.1 6.55,46.46 R16.1
OPA548_OUT
  Bottom 0.254: R16.2 3.81,48.16 | 3.81,48.16 3.6,48.16 3.17,48.58 3.17,56.2 4.49,57.52 5.71,57.52 | R38.2 3.49,43.19 3.17,43.5 3.17,47.53 3.81,48.16
  Bottom 1.27: 5.71,57.52 IC2.6 5.67,58.06 5.71,58.11
  Bottom 2.54: R17.1 5.71,61.13 5.71,58.11
OPA548_STAT  (via drill 0.35)
  Top 0.152: v16.19,32.07 36.2,32.07 38.74,29.53 41.91,29.53 42.23,29.85 42.23,30.68 U3.13
  Bottom 0.152: v16.19,32.07 16.19,31.86 R13.1
  Bottom 0.254: IC2.7 9.31,58.74 8.35,57.79 8.26,57.79 8.26,50.17 10.16,48.27 10.16,45.09 10.79,44.46 10.79,36.84 9.21,35.25 9.21,33.66 10.48,32.39 14.18,32.39 R13.1
OUT_ADC_IN  (via drill 0.3)
  Top 0.305: v49.53,28.9 49.53,30.83 U3.7
  Bottom 0.305: R40.1 50.17,29.53 v49.53,28.9
Q3D
  Top 0.254: R51.2 29.43,41.6 R34.1
  Top 0.305: 29.43,43.08 R51.2 29.95,44.03 R54.2
ROTA  (via drill 0.3)
  Top 0.152: U3.27 43.26,18.34 v40.96,20.64
  Bottom 0.254: v40.96,20.64 40.32,20.64 38.19,22.78 32.93,22.78 26.04,15.88 18.73,15.88 16.83,13.98 14.61,13.98 13.75,14.83 R25.1
ROTB  (via drill 0.3)
  Top 0.152: U3.28 44.53,18.34 v40.96,21.91
  Top 0.254: v17.46,16.52 14.29,16.52 13.65,17.15 13.65,18.1 14.29,18.74 14.29,19.69 13.65,20.33 13.02,20.33 12.7,20.64 v12.7,21.28
  Bottom 0.254: v40.96,21.91 40.32,21.91 38.74,23.5 32.7,23.5 25.72,16.52 v17.46,16.52 | v12.7,21.28 13.02,21.6 R24.1
ROTP  (via drill 0.3)
  Top 0.152: U3.30 47.07,13.9 45.72,15.25 45.72,18.42 v40.96,23.18
  Bottom 0.254: v40.96,23.18 40.01,24.14 32.38,24.14 25.4,17.15 18.1,17.15 16.51,18.74 16.51,24.45 15.88,25.09 13.97,25.09 13.65,25.41 13.65,25.94 R26.2
RTS  (via drill 0.3)
  Top 0.254: U4.2 28.89,10.17 30.16,10.17 v30.48,9.85
  Bottom 0.254: Q2.4 30.46,9.86 v30.48,9.85 30.48,11.33 R42.2
RX
  Bottom 0.254: D1.- 44.13,7.38 J7.3
RXD0  (via drill 0.3)
  Top 0.254: U3.34 52.15,13.9 51.44,14.61 48.58,14.61 v48.26,14.29
  Bottom 0.254: v48.26,14.29 48.26,13.56 R47.2 R45.2 43.57,11.12 D1.+
SCL
  Top 0.152: J4.3 31.75,30.8 32.07,31.12 35.24,31.12 37.47,28.9 42.55,28.9 43.26,29.61 U3.12
  Top 0.254: R30.2 30.7,28.48 J4.3
SDA
  Top 0.152: U3.11 44.53,29.93 43.01,28.41 37.39,28.41 35.98,26.99 R29.2
  Top 0.254: J4.4 34.51,29.32 R29.2
TXD0  (via drill 0.3)
  Top 0.254: v53.34,14.61 53.42,14.53 U3.35 53.42,11.99 v53.98,11.44 54.29,11.12 54.29,10.17 52.71,8.58 42.86,8.58 41.59,7.31 J7.2
  Bottom 0.254: R44.2 54.19,11.22 v53.98,11.44 | R48.2 52.49,13.76 v53.34,14.61
V33  (via drill 0.3)
  Top 0.254: R29.1 32.8,26.14 32.38,25.72 29.21,25.72 29,25.94 R30.1 | J4.2 29.21,27.21 R30.1 | C29.2 27.3,26.57 v27.3,26.04 | R30.1 27.3,26.99 27.09,27.2
  Top 0.61: D15.C 45.21,39.69 v43.5,39.69 | 43.18,39.69 43.45,39.96 C11.1 | v54.61,28.9 55.96,30.25 U3.2 55.88,30.99
  Top 0.635: IC3.5 23.99,36.48 C23.1 24.55,36.84 v25.08,36.84 | v8.89,38.11 8.53,38.11 IC6.5 | C29.2 27.09,27.2 29.21,29.32 J4.2 | C11.1 43.27,39.69 v42.55,39.69 | C11.1 43.73,39.69 v44.45,39.69 | C11.1 v43.5,39.69
  Bottom 0.254: R13.2 R23.2
  Bottom 0.61: v54.61,28.9 C4.1 C36.1 53.44,26.36 R2.2 | J7.4 45.26,7.77 Q1.1
  Bottom 0.635: C32.1 8.89,38.53 v8.89,38.11 | C36.1 55.03,26.04 53.76,24.77 51.12,24.77 50.59,24.24 R49.2 | R1.2 35.35,21.81 v35.24,21.91 | R22.2 13.33,19.37 v13.02,19.06 | R21.2 v13.02,23.82 | R23.2 13.65,28.8 v13.65,27.95
  other vias: 55.88,32.07 53.66,24.77 54.61,26.99
  pour Route15 (isolate 0.305, hatched): 40.32,41.28 40.32,36.2 26.99,36.2 24.77,38.42 1.91,38.42 0.64,37.15 0.64,0.64 0.95,0.32 58.1,0.32 58.74,0.96 58.74,40.65 58.1,41.28
V36
  Top 0.61: U2.OUT 50.17,40.6 C9.1 D15.A
  Top 0.635: D15.A 47.41,39.6 R10.1
  Bottom 0.61: R5.2 50.59,46.46 U2.OUT
  Bottom 0.635: R5.2 D2.A | U2.OUT 50.17,43.7 D3.C
V90  (via drill 0.3)
  Top 0.635: v46.04,55.25 46.46,55.25 R9.1
  Bottom 0.61: R3.2 50.06,63.19 U1.OUT 50.17,57.11 C5.1 | R7.1 44.68,54.38 | 45.32,54.38 46.04,55.1 v46.04,55.25
  Bottom 0.635: 44.68,54.38 45.32,54.38 49.13,54.38 49.78,55.03 49.78,56.72 C5.1 | D17.A R3.2 50.06,58.76 D4.C
V135  (via drill 0.3, 0.64)
  Top 0.61: v48.58,67.32 48.58,67 46.99,65.41 39.05,65.41 35.24,61.6 v35.24,60.65 | v26.04,59.7 25.52,59.18 23.05,59.18
  Top 0.635: R8.1 48.87,70.17 48.58,69.88 v48.58,67.32 | R46.2 16.09,45.27 16.8,45.98 16.8,46.36 | 16.8,46.36 16.8,54.01 14.61,56.2 | v26.35,46.36 20,46.36 | 20,46.36 16.8,46.36 | R32.2 20,45.83 20,46.36
  Top 1.016: 26.04,56.2 26.35,55.89 26.35,49.64 C42.2
  Top 1.27: 13.33,56.2 IC2.5 | v20.64,60.97 20.64,60.77 C18.+ | C18.+ 18.1,60.14 v18.1,60.97 | C18.+ 19.05,60.65 v19.37,60.97 | Q5.2 26.99,55.25 26.04,56.2
  Top 2.54: 13.33,56.2 14.61,56.2 16.07,56.2 C18.+ 23.05,59.18 26.04,56.2
  Bottom 0.406: R37.1 36.93,42.55 30.16,42.55 v26.35,46.36
  Bottom 0.61: C1.1 55.61,63.19 U1.IN 51.84,64.05 51.84,64.78 C2.1 48.94,67.68 v48.58,67.32 | v35.24,60.65 34.29,59.7 v26.04,59.7
  Bottom 0.635: D17.C 52.71,61.48 U1.IN
  Bottom 1.27: IC2.5 C16.1 14.47,56.29 C17.1 | C17.1 14.47,59.88 v14.61,60.01 | v13.33,59.7 v13.33,58.43 14.16,58.43 C17.1
  pour Route15 (isolate 0.305, hatched): 9.21,61.6 8.89,61.28 8.89,55.25 14.29,55.25 15.24,54.3 15.24,43.19 30.16,43.19 30.16,61.25
VBAT+
  Top 1.27: C34.1 31.92,60.16 33.02,59.06 33.02,55.89 33.66,55.25 Q4.2
  Top 2.54: J1.1 32.7,62.7 C34.1
  Route15 1.27: Q4.2 34.29,55.25 33.97,55.57
  Route15 2.54: 33.97,55.57 32.7,56.84 J1.1
  Bottom 0.635: D18.C 33.02,64.14 32.7,64.14
  Bottom 2.54: 32.7,64.14 J1.1
VCC_OPAMP  (via drill 0.3)
  Top 0.635: v14.61,41.09 14.73,40.96 14.92,40.96 14.89,41 IC1.5 14.29,42.77 R46.1
  Bottom 0.61: C15.1 14.47,38.51 C14.1
  Bottom 0.635: v14.61,41.09 C15.1 14.47,42.74 v14.61,42.87
VIN_LTC2950  (via drill 0.3)
  Top 0.305: R50.2 31.75,45.62 R54.1
  Top 0.406: v36.51,45.41 36.21,45.1 U5.1
  Top 0.508: v33.02,46.04 32.7,45.73 R54.1
  Bottom 0.305: 36.51,63.09 R19.1
  Bottom 0.406: C20.1 36.09,44.99 v36.51,45.41
  Bottom 0.508: C35.1 33.44,55.78 33.97,55.25 33.97,46.68 33.34,46.04 v33.02,46.04 35.88,46.04 v36.51,45.41
  Bottom 0.61: D10.C 26.79,57.79 Q5.3 | R19.1 36.62,58.01 Q4.3
  Bottom 1.016: 40.64,56.84 D9.C | Q5.3 30.7,57.79 C35.1
  Bottom 1.27: Q5.3 Q4.3 39.69,57.79 40.64,56.84
VSIG
  Bottom 1.27: D5.C 15.87,64.45
  Bottom 2.54: J5.1 15.88,64.46 15.87,64.45 13.97,62.55 R17.2
VUSB_5V  (via drill 0.3)
  Top 0.254: U4.15 31.43,15.03 C24.1
  Top 0.61: C24.1 C25.1 29,15.35 v24.77,11.12
  Bottom 0.61: L1.2 23.5,8.59 23.5,9.85 23.61,9.97 D11.A v24.77,11.12
VUSB_5V_PRE
  Bottom 0.61: L1.1 24.98,8.38 C28.1 24.98,5.62 24.77,5.4 22.22,5.4 17.2,10.43 13.31,10.43 J3.VBUS

## Text on the board
tNames: VBAT | OUTPUT | INPUT | GND | VSIG | GND | VBAT | On/Off | VBAT<=18V | V90PWR | VSIG Output Current =<2A | 3.3V PWR | Oled Conn | GND | 3.3V | SCL | SDA | Rotary Enc Conn | USB | !!Warning Pls Read USER MANUAL UGV201901 / Before operating this DEVICE | TX | RX | 3.3V | GND | Uart Prog